# Altium PCB rear.PcbDoc
Units mil, origin at the board's own origin, x right, y up, seen from the top; angles counter-clockwise.
Board outline 3814.96 x 1574.8 mil, 2 copper layers (Top Layer, Bottom Layer); 7 components, 0 nets, 4 pads, 0 vias.
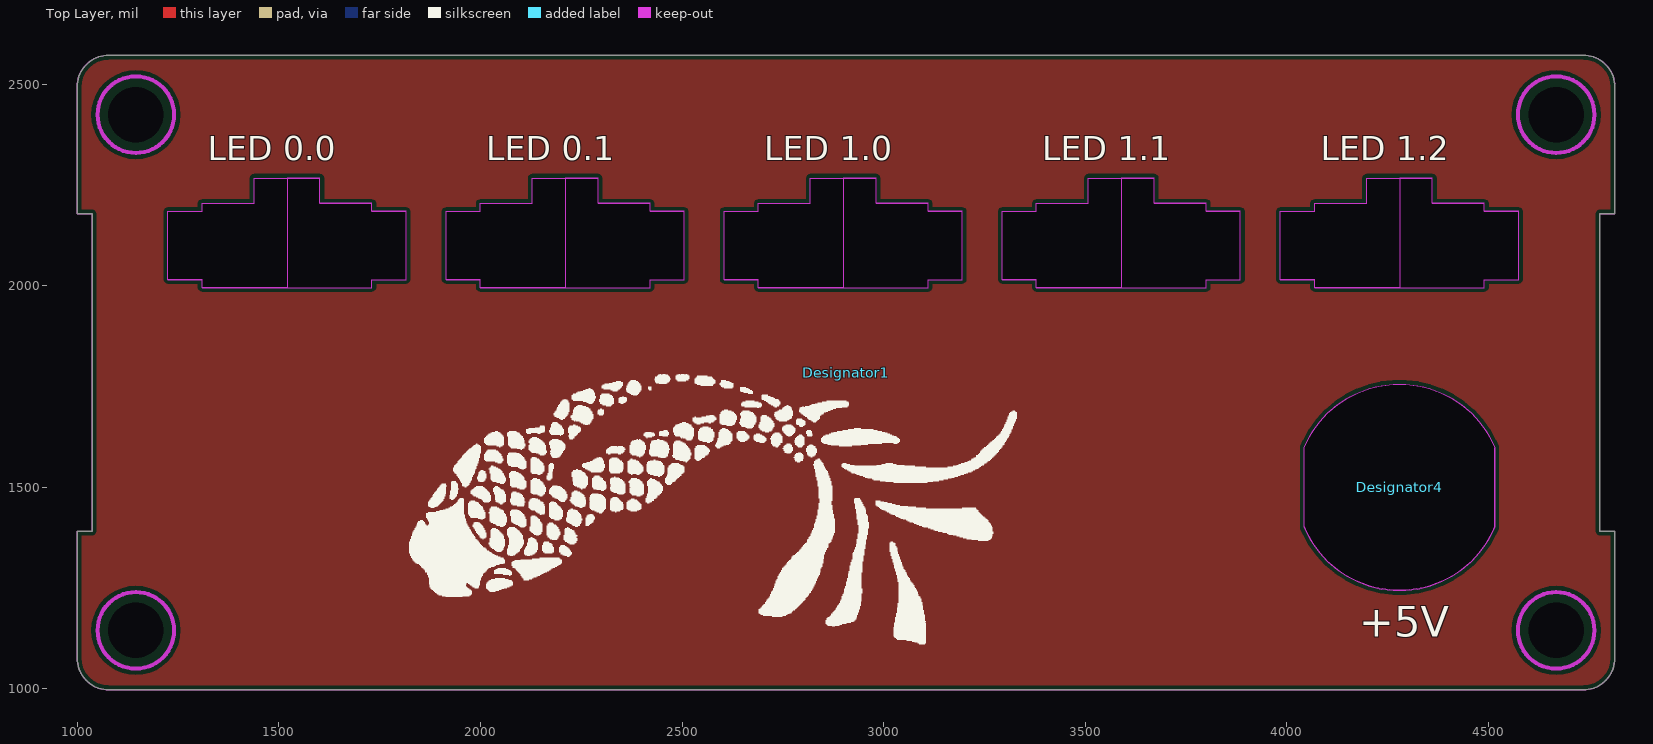
[diagram p0: Top Layer view]
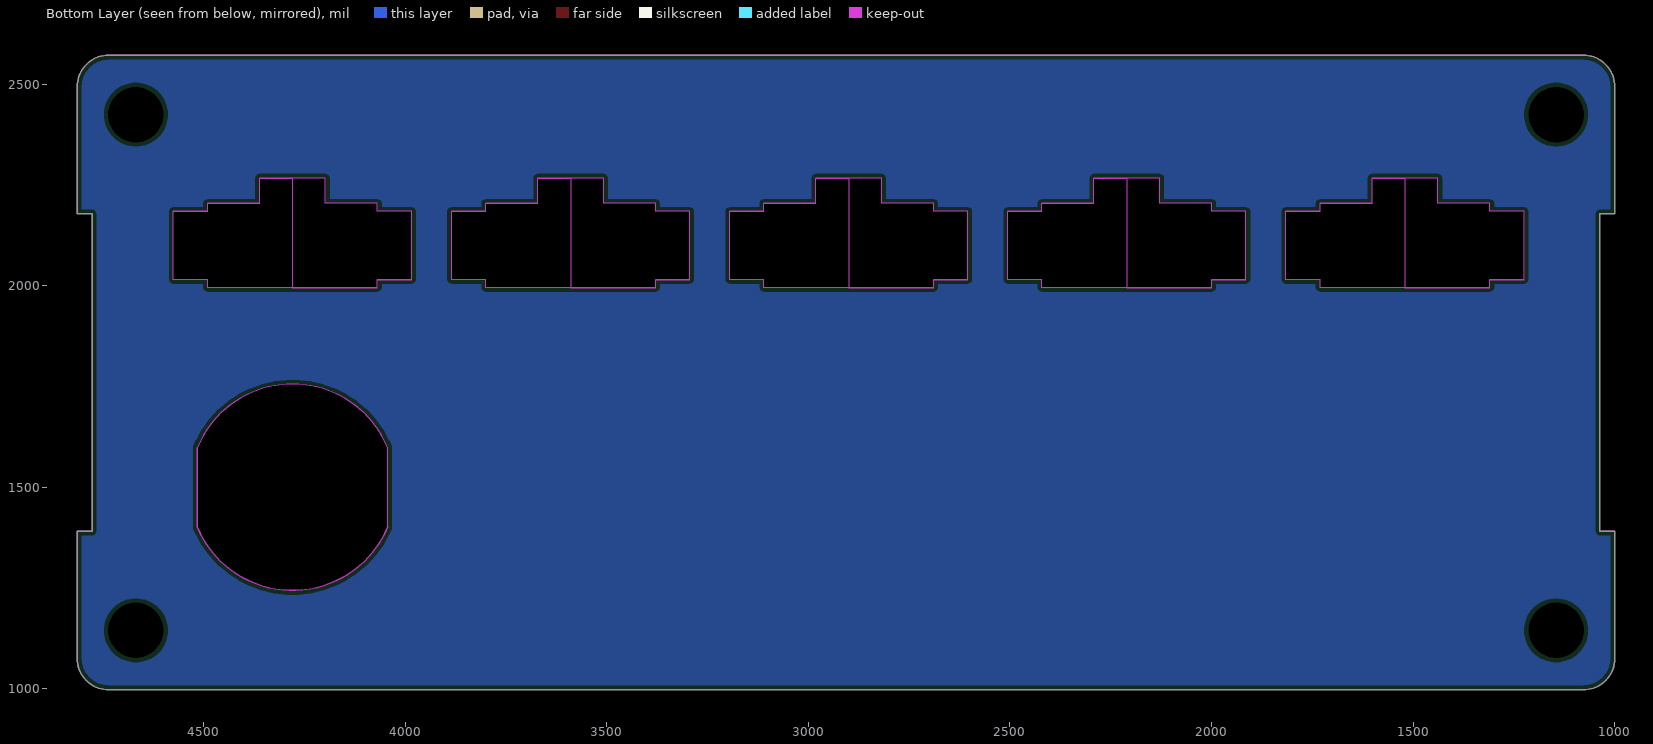
[diagram p1: Bottom Layer view, seen from below]

## Layer stack, top to bottom
Top Solder: solder mask 0.4, Solder Resist, Dk 3.5
Top Layer: signal copper 1.4
Dielectric 1: dielectric 12.6, FR-4, Dk 4.8
Bottom Layer: signal copper 1.4
Bottom Solder: solder mask 0.4, Solder Resist, Dk 3.5

## Board outline
999.33,1076.1 999.33,1391.06 1036.73,1391.06 1036.73,2178.46 999.33,2178.46 999.33,2493.43 cw(c1078.07,2493.43) 1078.07,2572.17 4735.55,2572.17 cw(c4735.55,2493.43) 4814.29,2493.43 4814.29,2178.46 4776.89,2178.46 4776.89,1391.06 4814.29,1391.06 4814.29,1076.1 cw(c4735.55,1076.1) 4735.55,997.36 1078.07,997.36 cw(c1078.07,1076.1)

## Design rules (kind name [scope] priority, off if disabled: settings)
Clearance [All] p1: gap=10 ignorepadtopadclearanceinfootprint=FALSE except(0: Arc-Hole Track-Hole SMDPad-Hole THPad-Hole Via-Hole Fill-Hole Poly-Hole Region-Hole Text-Hole)
PolygonConnect [All] p1: connectstyle=Relief reliefconductorwidth=10 reliefentries=4 polygonreliefangle="90 Angle" airgapwidth=10
RoutingVias [All] p1: holewidth=28 width=50 viastyle="Through Hole" minholewidth=28 minwidth=50 maxholewidth=28 maxwidth=50
SolderMaskExpansion [All] p1: expansion=4 istentingtop=FALSE
Width [All] p1: maxlimit=10 minlimit=10 preferedwidth=10
30 further rules are at their usual default settings.

## Components (designator, comment, footprint, x,y, rotation, side; value= is the part's Value field where it differs from the comment)
Designator1 "Comment" PANELOUTLINE 2906.81,1784.76 r0 top locked
Designator4 "Comment" "DC POWER JACK" 4280,1500 r0 top
"LED 0.0" "Comment" JST_SM_PANEL_4 1520,2100 r0 top
"LED 0.1" "Comment" JST_SM_PANEL_4 2210,2100 r0 top
"LED 1.0" "Comment" JST_SM_PANEL_4 2900,2100 r0 top
"LED 1.1" "Comment" JST_SM_PANEL_4 3590,2100 r0 top
"LED 1.2" "Comment" JST_SM_PANEL_4 4280,2100 r0 top

## Footprints (in the part's own frame and the unit in brackets; to place one, negate y for a bottom-side part, rotate by r counter-clockwise, add the part's x,y. Pads: shape width x height; smd on the part's side, far side on the other; paste and mask are expansions set on the pad)
"DC POWER JACK" [mil]
  Keep-Out Layer board cut-out: -236.22,-98.43 -236.22,98.43 -165.95,194.8 -59.64,248.86 59.64,248.86 165.95,194.8 236.22,98.43 236.22,98.43 236.22,-98.43 165.95,-194.8 59.64,-248.86 -59.64,-248.86 -165.95,-194.8 -236.22,-98.43
JST_SM_PANEL_4 [mil]
  Keep-Out Layer board cut-out: 0,-104.33 -210.63,-104.33 -210.63,-84.65 -295.28,-84.65 -295.28,84.65 -210.63,84.65 -210.63,104.33 -81.69,104.33 -81.69,167.32 0,167.32 0,0.98
  Keep-Out Layer board cut-out: 0,-104.33 210.63,-104.33 210.63,-84.65 295.28,-84.65 295.28,84.65 210.63,84.65 210.63,104.33 81.69,104.33 81.69,167.32 0,167.32 0,0.98
PANELOUTLINE [mm] "https://www.amazon.com/gp/product/B010DHQPVW"
  round 0 hole 3.5: C10(-44.75,-16.25) C10(-44.75,16.25) C10(44.75,-16.25) C10(44.75,16.25)

## Nets (pads, with @x,y where several pads share a name; then routed paths per layer and width w, separated by ;. In a path a pad name is that pad's centre, name@x,y a point inside that pad or via, vN(x,y) a via of type N, cw(c..) or ccw(c..) an arc to the next point about the centre after c; other vN are vias at no path point)
pads on no net: Designator1.C10

## Polygon pours and split planes (outlines as drawn)
no net on Top Layer "NONET_L01_P001" (solid, pour order 1): 4814.29,1390 4775,1390 4775,2180 4814.29,2180 4814.29,2575 1005,2575 1005,2175 1035,2175 1035,1391.06 1005,1391.06 1005,995 4814.29,995
no net on Bottom Layer "NONET_L02_P000" (solid, pour order 0): 4814.29,1390 4775,1390 4775,2180 4814.29,2180 4814.29,2575 1005,2575 1005,2175 1035,2175 1035,1391.06 1005,1391.06 1005,995 4814.29,995

## Keep-outs
Top Layer:
  circle w10: c1145,1145 r95
  circle w10: c4668.62,1145 r95
  circle w10: c4668.62,2424.53 r95
  circle w10: c1145,2424.53 r95
Keep-Out Layer:
  lines w2: 4043.78,1401.57 4049.57,1387.67 4064.34,1361.41 4082.1,1337.06 4102.58,1314.97 4125.51,1295.43 4150.58,1278.72 4177.44,1265.06 4205.71,1254.65 4235.01,1247.63 4264.94,1244.1 4295.06,1244.09 4324.99,1247.63 4354.29,1254.65 4382.56,1265.06 4409.42,1278.72 4434.49,1295.43 4457.42,1314.97 4477.9,1337.06 4495.65,1361.41 4510.43,1387.67 4516.22,1401.57 4516.22,1598.43 ; 4043.78,1401.57 4043.78,1401.57 ; 4043.78,1401.57 4043.78,1598.43 4049.57,1612.33 4064.34,1638.59 4082.1,1662.94 4102.58,1685.03 4125.51,1704.57 4150.58,1721.28 4177.44,1734.94 4205.71,1745.35 4235.01,1752.37 4264.94,1755.91 4295.06,1755.91 4324.99,1752.37 4354.29,1745.35 4382.56,1734.94 4409.42,1721.28 4434.49,1704.57 4457.42,1685.03 4477.9,1662.94 4495.65,1638.59 4510.43,1612.33 4516.22,1598.43 ; 4516.22,1598.43 4516.22,1598.43 ; 999.33,1068.35 999.33,1076.1 999.33,1391.06 1036.73,1391.06 1036.73,2178.46 999.33,2178.46 999.33,2493.43 999.33,2501.18 1002.36,2516.39 1008.29,2530.72 1016.91,2543.62 1027.88,2554.59 1040.77,2563.2 1055.1,2569.14 1070.32,2572.17 1078.07,2572.17 4735.55,2572.17 4743.31,2572.17 4758.52,2569.14 4772.85,2563.2 4785.75,2554.59 4796.71,2543.62 4805.33,2530.72 4811.27,2516.39 4814.29,2501.18 4814.29,2493.43 4814.29,2178.46 4776.89,2178.46 4776.89,1391.06 4814.29,1391.06 4814.29,1076.1 4814.29,1068.35 4811.27,1053.13 4805.33,1038.8 4796.71,1025.91 4785.74,1014.94 4772.85,1006.32 4758.52,1000.39 4743.31,997.36 1070.32,997.36 1055.1,1000.39 1040.77,1006.32 1027.88,1014.94 1016.91,1025.91 1008.29,1038.8 1002.36,1053.13 999.33,1068.35 ; 1224.72,2015.35 1309.37,2015.35 1309.37,1995.67 1730.63,1995.67 1730.63,2015.35 1815.28,2015.35 1815.28,2184.65 1730.63,2184.65 1730.63,2204.33 1601.69,2204.33 1601.69,2267.32 1438.31,2267.32 1438.31,2204.33 1309.37,2204.33 1309.37,2184.65 1224.72,2184.65 1224.72,2015.35 ; 1914.72,2015.35 1999.37,2015.35 1999.37,1995.67 2420.63,1995.67 2420.63,2015.35 2505.28,2015.35 2505.28,2184.65 2420.63,2184.65 2420.63,2204.33 2291.69,2204.33 2291.69,2267.32 2128.31,2267.32 2128.31,2204.33 1999.37,2204.33 1999.37,2184.65 1914.72,2184.65 1914.72,2015.35 ; 2604.72,2015.35 2689.37,2015.35 2689.37,1995.67 3110.63,1995.67 3110.63,2015.35 3195.28,2015.35 3195.28,2184.65 3110.63,2184.65 3110.63,2204.33 2981.69,2204.33 2981.69,2267.32 2818.31,2267.32 2818.31,2204.33 2689.37,2204.33 2689.37,2184.65 2604.72,2184.65 2604.72,2015.35 ; 3294.72,2015.35 3379.37,2015.35 3379.37,1995.67 3800.63,1995.67 3800.63,2015.35 3885.28,2015.35 3885.28,2184.65 3800.63,2184.65 3800.63,2204.33 3671.69,2204.33 3671.69,2267.32 3508.31,2267.32 3508.31,2204.33 3379.37,2204.33 3379.37,2184.65 3294.72,2184.65 3294.72,2015.35 ; 3984.72,2015.35 4069.37,2015.35 4069.37,1995.67 4490.63,1995.67 4490.63,2015.35 4575.28,2015.35 4575.28,2184.65 4490.63,2184.65 4490.63,2204.33 4361.69,2204.33 4361.69,2267.32 4198.31,2267.32 4198.31,2204.33 4069.37,2204.33 4069.37,2184.65 3984.72,2184.65 3984.72,2015.35

## Silkscreen, mask and mechanical layers (free items; w line width, h text height)
Top Overlay:
  drawing of 104 lines, arcs and shapes, not listed
  text "+5V" at 4180.03,1129.02 h75
Top Solder:
  drawing of 27 lines, arcs and shapes, not listed